# Altium PCB radxa_cm3_io_board_v1330.PcbDoc (part 8 of 8)
Units mil, origin at the board's own origin, x right, y up, seen from the top; angles counter-clockwise.
Board outline 6299.61 x 3544.09 mil, 4 copper layers (Top, GND, Power, Bottom), stack 35.4 mil thick; 547 components, 411 nets, 1952 pads, 2650 vias.
Unrouted connection lines stored in the file: 280.
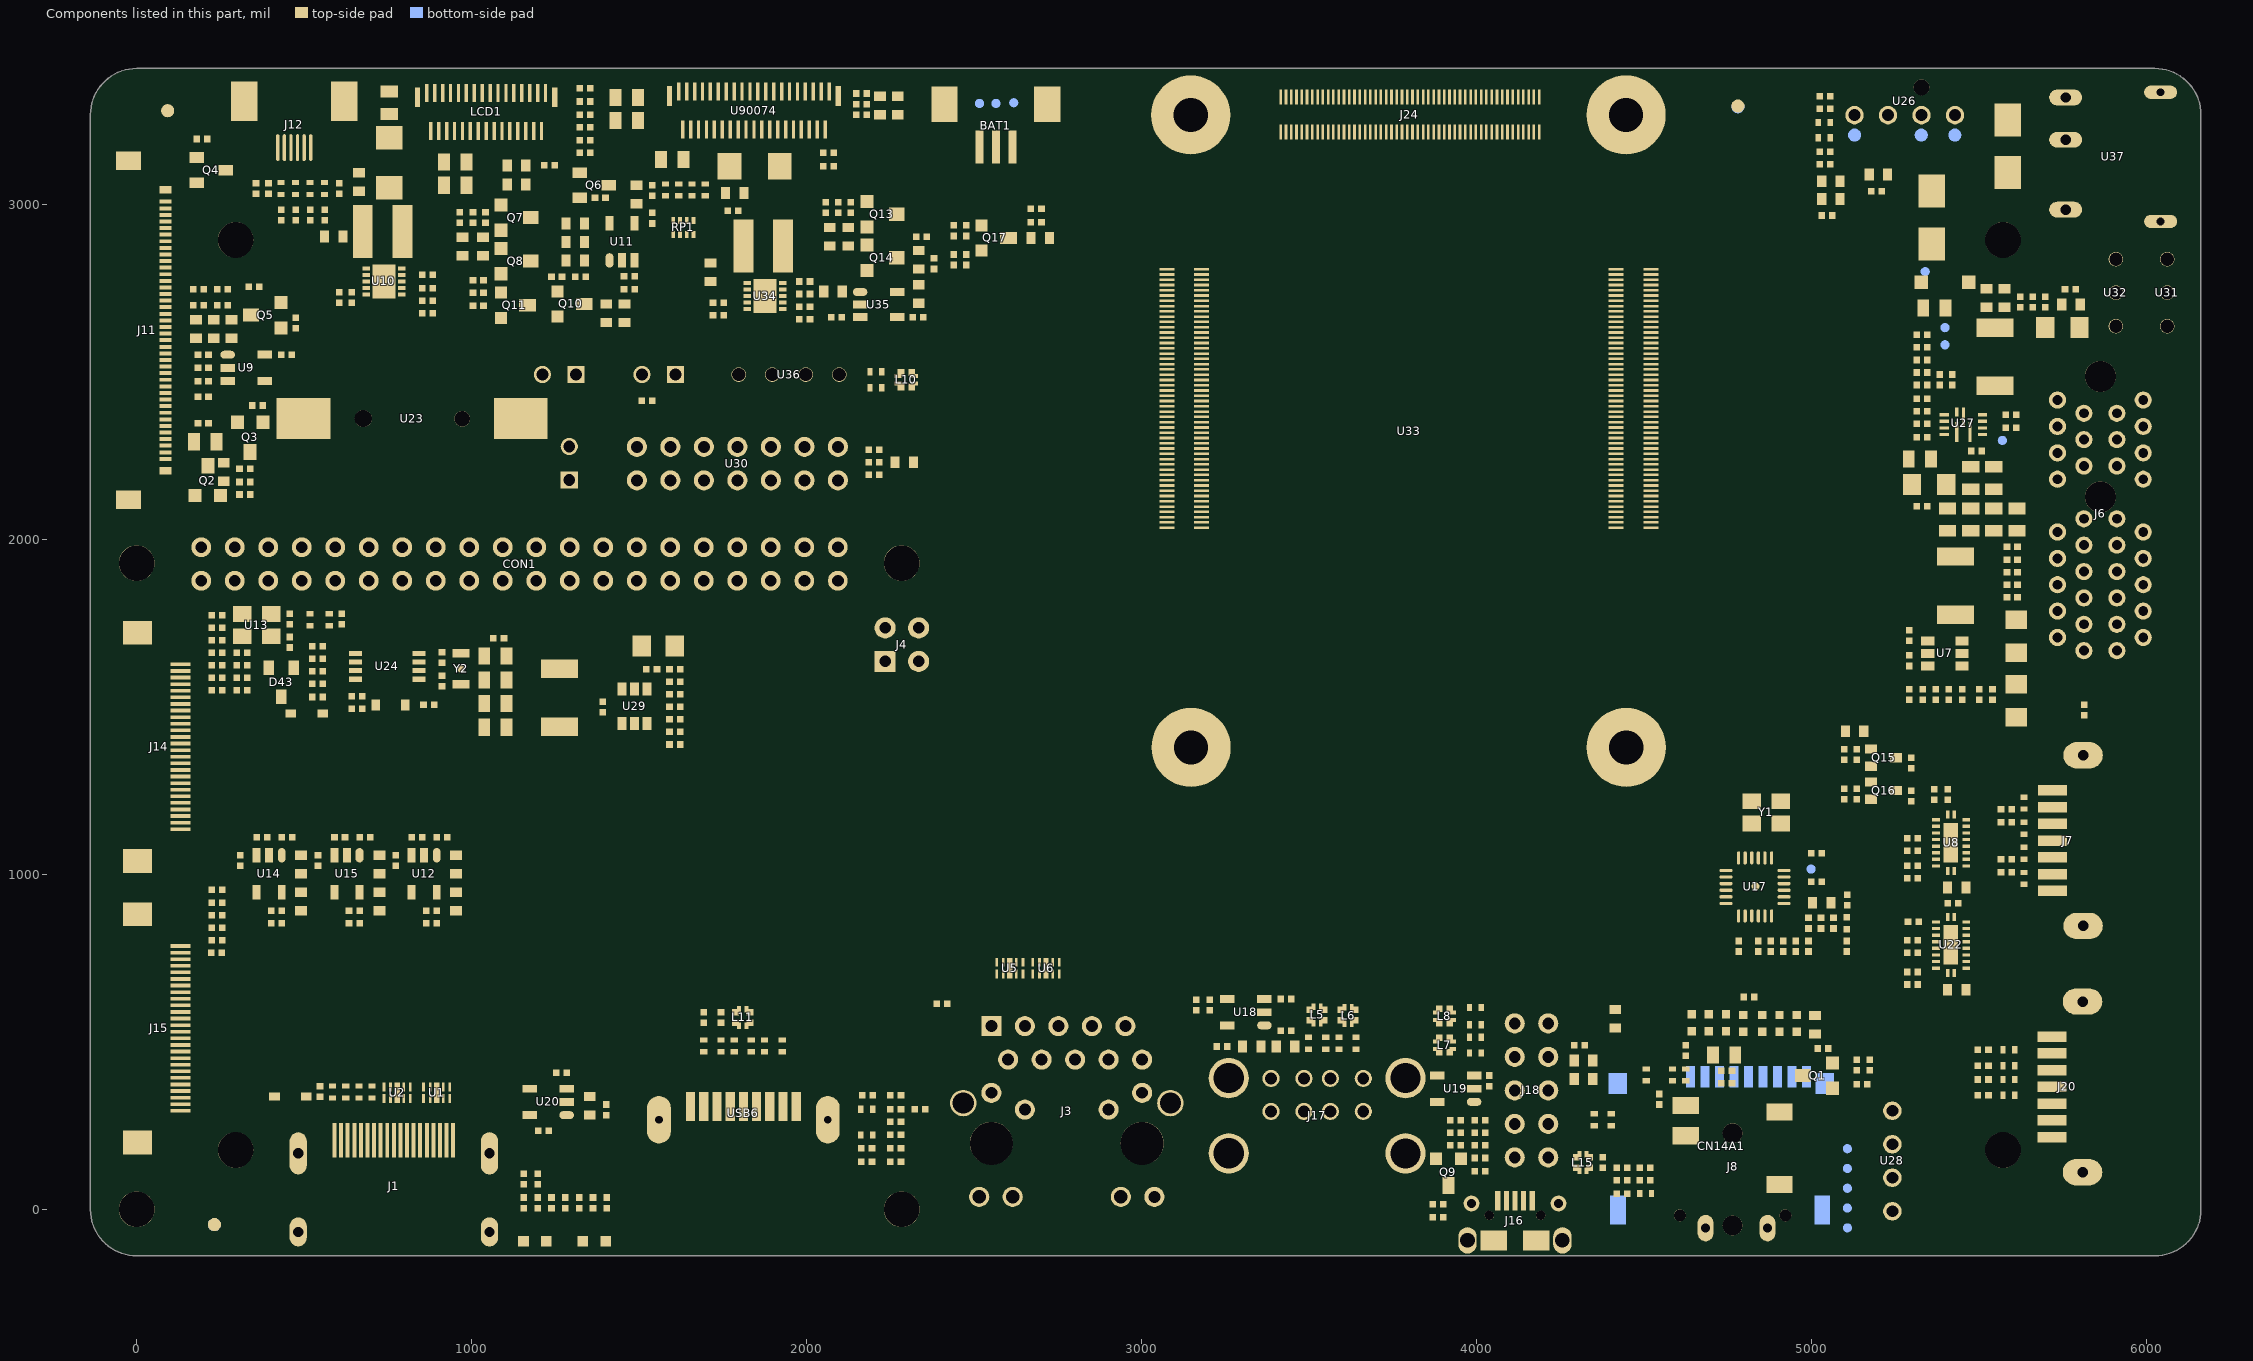
[diagram p10: the components of this part, seen from the top]

## Silkscreen, mask and mechanical layers (free items; w line width, h text height)
Silkscreen Top:
  drawing of 39800 lines, arcs and shapes, not listed
  text "FAN" at 4911.42,3311.02 h23.62
  text "TP_1" at 251.97,3257.87 h23.62 r90
  text "BAT_3V7" at 2828.74,3188.98 h23.62 r90
  text "MIPI_LCD_1" at 1066.93,3153.54 h19.68
  text "Connector3" at 3690.94,3110.24 h23.62
  text "MIPI_LCD_2" at 1964.57,3045.28 h23.62
  text "TS" at 2523.62,3035.43 h23.62 r90
  text "BAT-" at 2580.71,3011.81 h23.62 r90
  text "BAT+" at 2641.73,3009.84 h23.62 r90
  text "GND" at 5129.92,2903.54 h23.62 r90
  text "12V" at 5177.17,2903.54 h23.62 r90
  text "PWM" at 5271.65,2895.67 h23.62 r90
  text "TACH" at 5224.41,2887.8 h23.62 r90
  text "12V_DC" at 5661.42,2874.02 h23.62
  text "input" at 5685.04,2824.8 h23.62
  text "EDR_LCD" at 187.01,2809.06 h23.62 r90
  text "BAT_RTC" at 551.18,2673.23 h23.62 r90
  text "5V" at 2116.14,2576.77 h23.62 r90
  text "DP" at 1911.42,2572.83 h23.62 r90
  text "DM" at 2011.81,2572.83 h23.62 r90
  text "SPK" at 1230.31,2557.09 h23.62
  text "MIC" at 1535.43,2557.09 h23.62
  text "GND" at 1809.06,2555.12 h23.62 r90
  text "USB2.0" at 2171.26,2541.34 h23.62
  text "Connector1" at 4342.52,2368.11 h23.62 r90
  text "Recovery" at 1210.63,2352.36 h23.62
  text "Connector2" at 3273.62,2352.36 h23.62 r90
  text "GND" at 2005.91,2342.52 h23.62 r90
  text "Power_Key" at 2275.59,2287.4 h23.62
  text "PCIE_x1" at 6096.46,2037.4 h23.62 r90
  text "GND" at 409.45,2017.72 h19.68 r90
  text "TX" at 505.91,2017.72 h19.68 r90
  text "RX" at 604.33,2017.72 h19.68 r90
  text "POE" at 2253.94,1492.13 h23.62
  text "V1.33" at 1785.43,1431.1 h39.37
  text "Camera_1" at 224.41,1269.68 h23.62 r90
  text "ROCK3 Compute Module IO Board" at 3153.54,893.7 h49.21
  text "5V" at 4094.49,824.8 h23.62
  text "5V" at 4198.82,824.8 h23.62
  text "SATA2" at 5643.7,795.28 h23.62 r90
  text "DM" at 4094.49,777.56 h23.62
  text "DM" at 4198.82,777.56 h23.62
  text "DP" at 4094.49,732.28 h23.62
  text "DP" at 4198.82,732.28 h23.62
  text "GND" at 4074.8,685.04 h23.62
  text "GND" at 4179.13,681.1 h23.62
  text "Ethernet" at 2856.3,649.61 h23.62
  text "NC" at 4090.55,631.89 h23.62
  text "NC" at 4192.91,627.95 h23.62
  text "SATA1" at 5645.67,561.02 h23.62 r90
  text "External_USB" at 4324.8,541.34 h23.62 r90
  text "USB2.0" at 3753.94,474.41 h23.62 r90
  text "USB3.0" at 1421.26,440.94 h23.62
  text "Camera_2" at 222.44,437.01 h23.62 r90
  text "Ext_PSU" at 5226.38,387.8 h23.62
  text "PHONE" at 4818.9,348.43 h23.62
  text "12V" at 5368.11,279.53 h23.62
  text "HDMI" at 444.88,255.91 h23.62
  text "GND" at 5368.11,177.17 h23.62
  text "GND" at 5368.11,76.77 h23.62
  text "5V" at 5379.92,-19.69 h23.62
  text "USB_OTG" at 4324.8,-104.33 h23.62
Silkscreen Bottom:
  text "TF" at 4562.99,464.57 h23.62
Drill Drawing:
  lines w3.94: 5970.47,3163.39 5970.47,3222.44 6031.5,3222.44 6031.5,3163.39 5970.47,3163.39
Layer_103:
  drawing of 25203 lines, arcs and shapes, not listed
Layer_104:
  lines w1: 2368.11,622.05 2368.11,3393.7 5251.97,3393.7 5251.97,622.05 2368.11,622.05